# Altium PCB Routing.PCBDOC
Units mm, origin at the board's own origin, x right, y up, seen from the top; angles counter-clockwise.
Board outline 69 x 56 mm, 2 copper layers (Top Layer, Bottom Layer); 41 components, 46 nets, 175 pads, 55 vias.
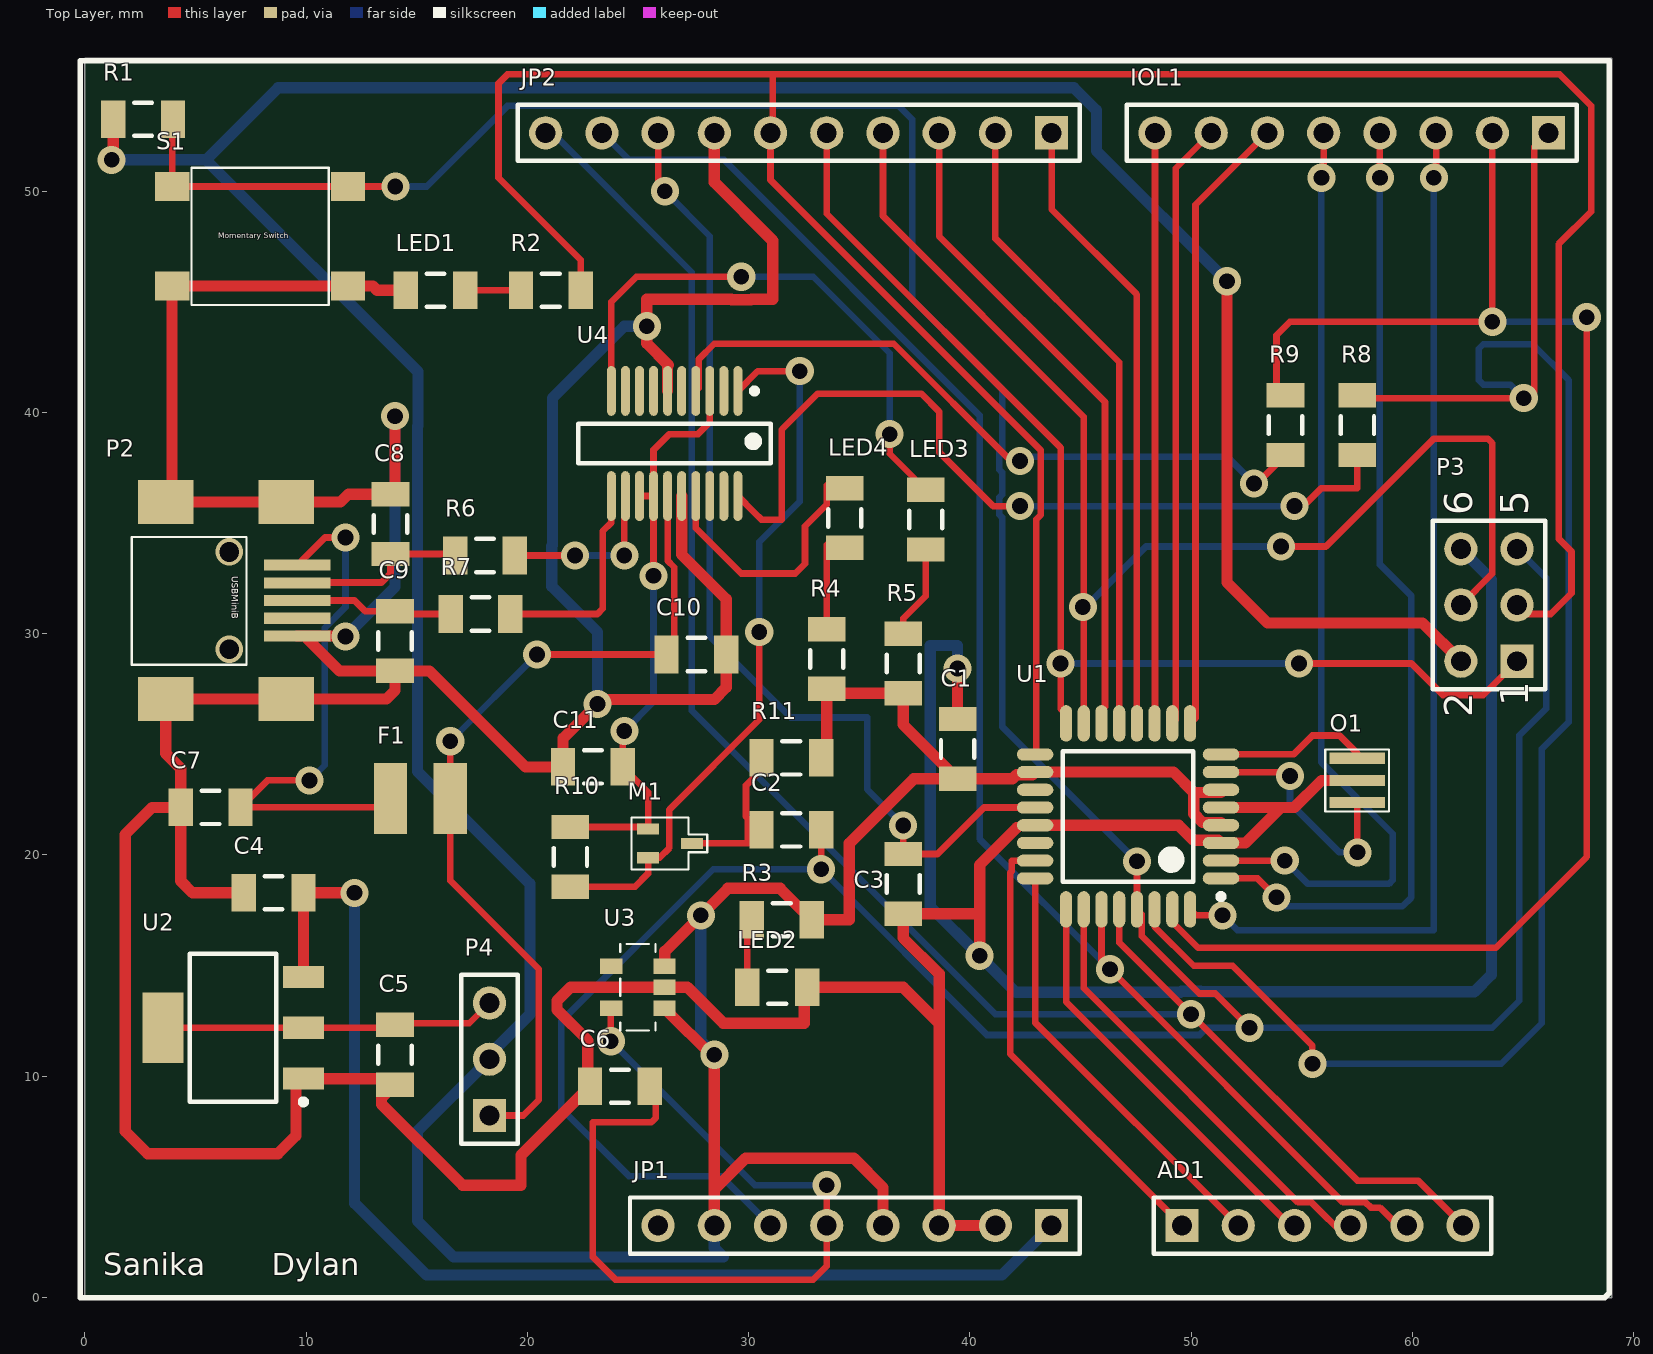
[diagram p0: Top Layer view]
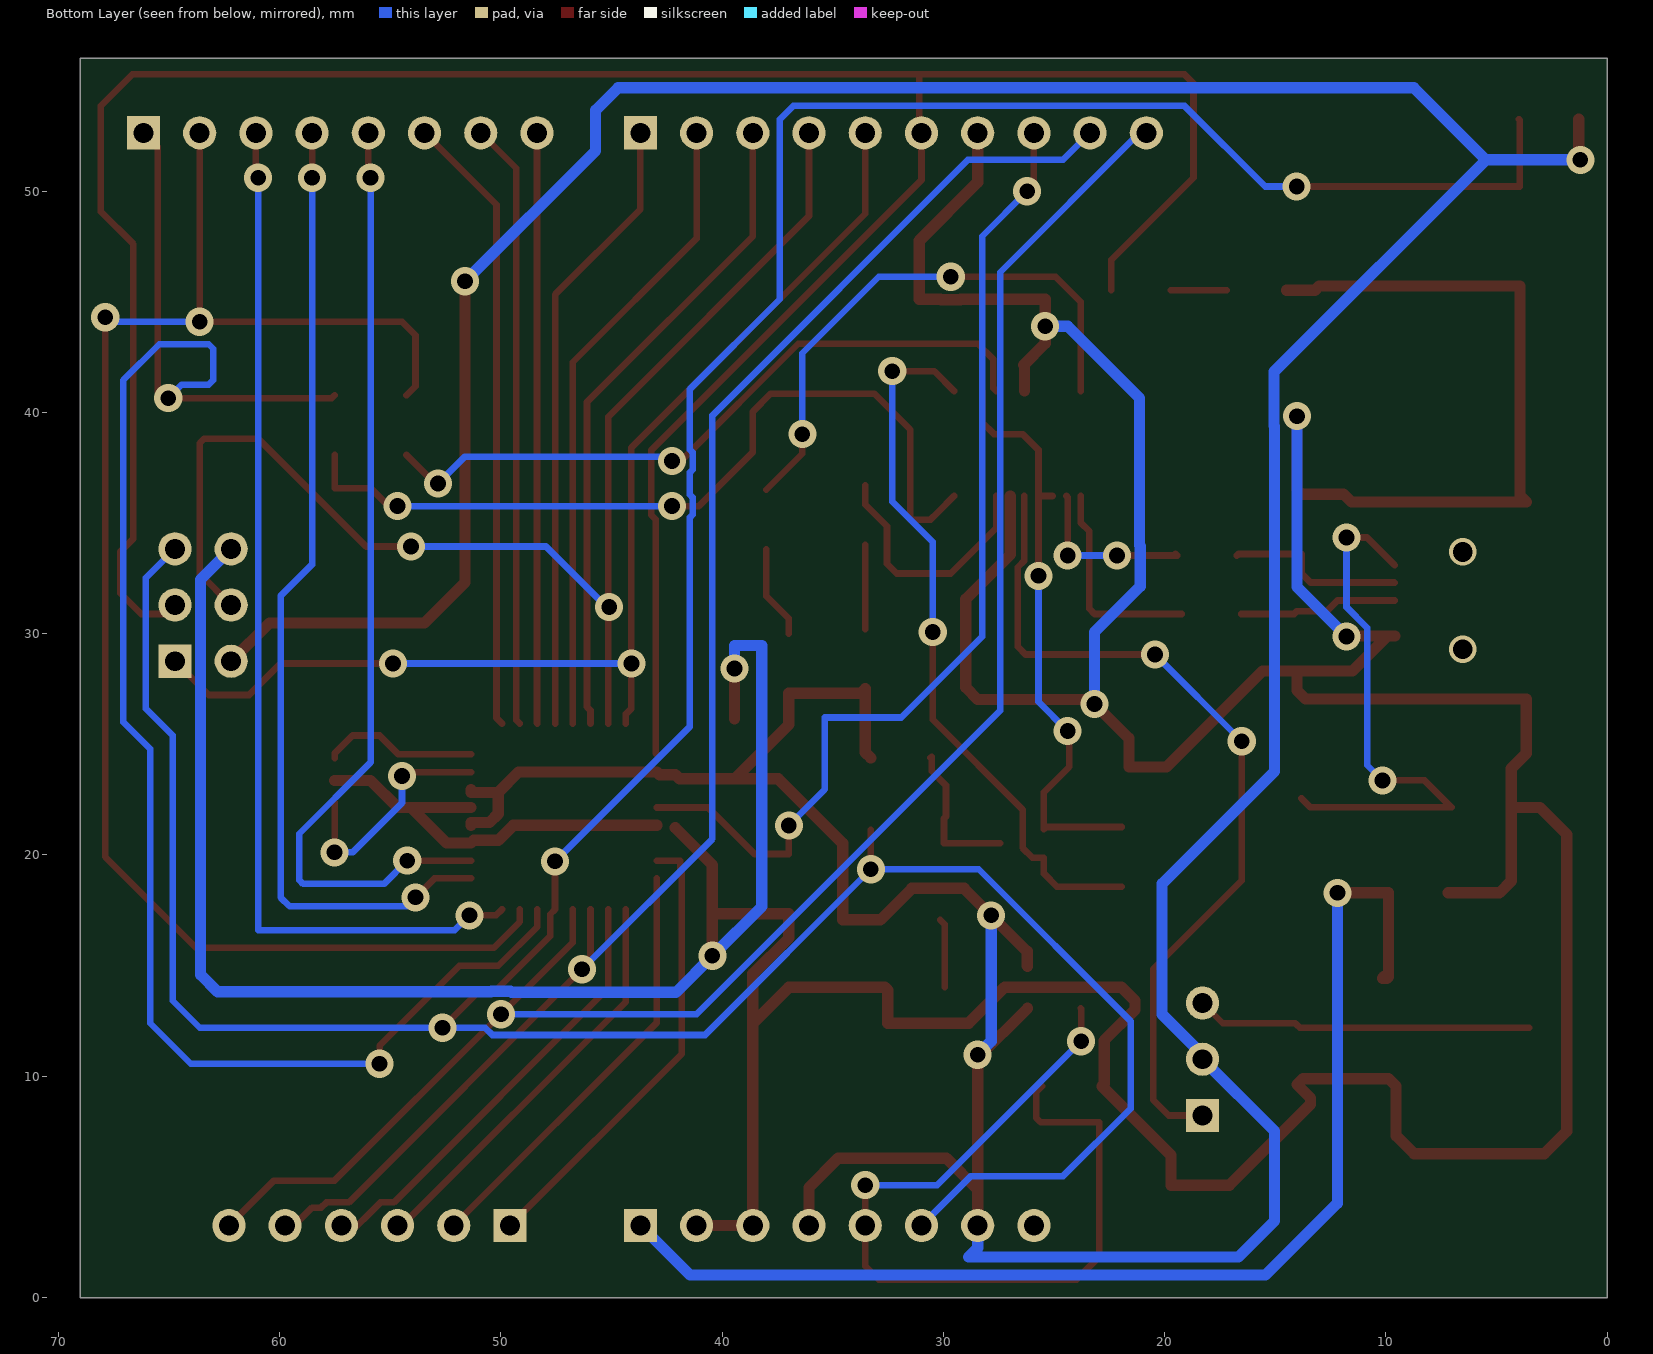
[diagram p1: Bottom Layer view, seen from below]

## Layer stack, top to bottom
Top Solder: solder mask 0.0102, Solder Resist, Dk 3.5
Top Layer: signal copper 0.0356
Dielectric1: dielectric 0.32, FR-4, Dk 4.8
Bottom Layer: signal copper 0.0356
Bottom Solder: solder mask 0.0102, Solder Resist, Dk 3.5

## Board outline
0,0 0,56 69,56 69,0

## Design rules (kind name [scope] priority, off if disabled: settings)
Clearance [All] p1: gap=0.152 ignorepadtopadclearanceinfootprint=FALSE except(0: Arc-Hole Track-Hole SMDPad-Hole THPad-Hole Via-Hole Fill-Hole Poly-Hole Region-Hole Text-Hole; 0.381: Arc-Poly Track-Poly SMDPad-Poly THPad-Poly Via-Poly Fill-Poly Poly-Poly)
FabricationTestPointUsage TestPointUsage [All] p1: valid=0 allowmultiple=FALSE
FabricationTestpoint Testpoint [All] p1: side=3 testpointundercomponent=TRUE minsize=1.016 maxsize=2.54 preferedsize=1.524 minholesize=0 maxholesize=1.016 preferedholesize=0.813 testpointgrid=0.025 allowsidetop=TRUE allowsidebottom=TRUE usegrid=TRUE gridtolerance=0
PolygonConnect [All] p1: connectstyle=Relief reliefconductorwidth=0.254 reliefentries=4 polygonreliefangle="90 Angle" airgapwidth=0.254
RoutingVias [All] p1: holewidth=1.2 width=2.4 viastyle="Through Hole" minholewidth=0.6 minwidth=1.015 maxholewidth=1.2 maxwidth=2.4
SilkToSolderMaskClearance SilkscreenOverComponentPads [IsPad] p1: minsilkscreentomaskgap=0.254 clearancetoexposedcopper=TRUE
SolderMaskExpansion [All] p1: expansion=0.102
Width Width_power [(InNet('5V') OR InNet('VIN') OR InNet('GND'))] p1: maxlimit=0.508 minlimit=0.254 preferedwidth=0.508
Width Width_signal [All] p2: maxlimit=0.305 minlimit=0.203 preferedwidth=0.3 minimp=50.000000 maximp=50.000000 favimp=50.000000
27 further rules are at their usual default settings.

## Components (designator, comment, footprint, x,y, rotation, side; value= is the part's Value field where it differs from the comment)
AD1 "Header 6" HDR1X6 49.581,3.251 r0 top
C1 "Cap Semi" C1206 39.44,24.79 r270 top value=0.1uF
C2 "Cap Semi" C1206 31.927,21.133 r180 top value=0.1uF
C3 "Cap Semi" C1206 36.982,18.694 r90 top value=0.1uF
C4 "Cap Pol3" C1206 8.534,18.288 r180 top value=47uF
C5 "Cap Pol3" C1206 14.021,10.973 r270 top value=10uF
C6 "Cap Pol3" C1206 24.181,9.55 r180 top value=10uF
C7 "Cap Semi" C1206 5.69,22.149 r0 top value=0.1uF
C8 "Cap Semi" C1206 13.818,34.95 r270 top value=47pF
C9 "Cap Semi" C1206 14.021,29.667 r90 top value=47pF
C10 "Cap Pol3" C1206 27.635,29.058 r0 top value=10uF
C11 "Cap Semi" C1206 22.962,23.978 r0 top value=0.1uF
F1 "Component_1" fuse 13.818,22.555 r0 top
IOL1 "Header 8" HDR1X8 66.142,52.629 r180 top
JP1 "Header 8" HDR1X8 43.688,3.251 r180 top
JP2 "Header 10" HDR1X10 43.688,52.629 r180 top
LED1 "LED2" C1206 15.85,45.517 r180 top
LED2 "LED2" C1206 31.293,14.021 r0 top
LED3 "LED2" C1206 37.998,35.154 r90 top
LED4 "LED2" C1206 34.341,35.226 r90 top
M1 "2N7002PW" 2N7002PW-SOT323 25.582,20.523 r180 top
O1 "Resonator" Resonator 57.506,23.368 r90 top
P2 "USBMini-B" USBMiniB 5.08,31.496 r270 top
P3 "Header 3X2" HDR2X3 64.719,28.753 r90 top
P4 "Header 3" HDR1X3 18.288,8.23 r90 top
R1 "Res3" C1206 2.642,53.238 r180 top value=10K
R2 "Res3" C1206 21.06,45.517 r0 top value=1K
R3 "Res3" C1206 31.496,17.069 r0 top value=1K
R4 "Res3" C1206 33.528,28.854 r270 top value=1K
R5 "Res3" C1206 36.982,28.651 r270 top value=1K
R6 "Res3" C1206 18.085,33.528 r180 top value=27
R7 "Res3" C1206 17.882,30.886 r180 top value=27
R8 "Res3" C1206 57.506,39.421 r270 top value=1K
R9 "Res3" C1206 54.254,39.421 r270 top value=1K
R10 "Res3" C1206 21.946,19.914 r90 top value=10K
R11 "Res3" C1206 31.927,24.384 r0 top value=10K
S1 "switch" MomentarySwitch 7.925,47.955 r0 top
U1 "ATmega328-AU" 32A_N 47.142,21.742 r180 top
U2 "REG1117" TI-DCY4_N 6.706,12.192 r180 top
U3 "MIC5205" SOT23-5 24.994,14.021 r90 top
U4 "FTDI" FT231XS 26.655,38.626 r270 top

## Footprints (in the part's own frame and the unit in brackets; to place one, negate y for a bottom-side part, rotate by r counter-clockwise, add the part's x,y. Pads: shape width x height; smd on the part's side, far side on the other; paste and mask are expansions set on the pad)
2N7002PW-SOT323 [mm]
  rect 1x0.5 smd mask+0.1: 1(0.125,-0.65) 2(0.125,0.65) 3(-1.85,0)
  silkscreen extent -2.55,-1.17 0.87,1.17
32A_N [mm] "Thin QFP, 32-Leads, Body 7x7mm, Pitch 0.8mm, IPC Medium Density"
  oval 1.65x0.55 smd: 1(-4.2,2.8) 2(-4.2,2) 3(-4.2,1.2) 4(-4.2,0.4) 5(-4.2,-0.4) 6(-4.2,-1.2) 7(-4.2,-2) 8(-4.2,-2.8) 17(4.2,-2.8) 18(4.2,-2) 19(4.2,-1.2) 20(4.2,-0.4) 21(4.2,0.4) 22(4.2,1.2) 23(4.2,2) 24(4.2,2.8)
  oval 0.55x1.65 smd: 9(-2.8,-4.2) 10(-2,-4.2) 11(-1.2,-4.2) 12(-0.4,-4.2) 13(0.4,-4.2) 14(1.2,-4.2) 15(2,-4.2) 16(2.8,-4.2) 25(2.8,4.2) 26(2,4.2) 27(1.2,4.2) 28(0.4,4.2) 29(-0.4,4.2) 30(-1.2,4.2) 31(-2,4.2) 32(-2.8,4.2)
  silkscreen extent -4.33,-2.95 2.95,3.75, body extent -3.5,-3.5 3.5,3.5, height 1.2
C1206 [mm] "Chip Capacitor, Body 3.2x1.6mm, IPC High Density"
  rect 1.1x1.7 smd: 1(-1.35,0) 2(1.35,0)
  silkscreen extent -0.4,-0.75 0.4,0.75, body extent -1.7,-0.9 1.7,0.9, height 1.3
FT231XS [mm] "FTDI"
  oval 2.25x0.4 smd: 1(-2.34,2.859) 2(-2.34,2.224) 3(-2.34,1.589) 4(-2.34,0.954) 5(-2.34,0.319) 6(-2.34,-0.316) 7(-2.34,-0.951) 8(-2.34,-1.586) 9(-2.34,-2.221) 10(-2.34,-2.856) 11(2.41,-2.856) 12(2.41,-2.221) 13(2.41,-1.586) 14(2.41,-0.951) 15(2.41,-0.316) 16(2.41,0.319) 17(2.41,0.954) 18(2.41,1.589) 19(2.41,2.224) 20(2.41,2.859)
  silkscreen extent -2.46,-4.35 0.94,4.35, body extent -1.96,-4.37 2.03,4.37, height 1.76
fuse [mm]
  rect 1.5x3.2 smd: 1(0,0) 2(2.7,0)
HDR1X3 [mm] "Connector; Header; 3 Position"
  rect 1.5x1.5 hole 0.9: 1(0,0)
  round 1.5 hole 0.9: 2(2.54,0) 3(5.08,0)
  silkscreen extent -1.27,-1.27 6.35,1.27
HDR1X6 [mm] "Connector; Header; 6 Position"
  rect 1.5x1.5 hole 0.9: 1(0,0)
  round 1.5 hole 0.9: 2(2.54,0) 3(5.08,0) 4(7.62,0) 5(10.16,0) 6(12.7,0)
  silkscreen extent -1.27,-1.27 13.97,1.27
HDR1X8 [mm] "Connector; Header; 8 Position"
  rect 1.5x1.5 hole 0.9: 1(0,0)
  round 1.5 hole 0.9: 2(2.54,0) 3(5.08,0) 4(7.62,0) 5(10.16,0) 6(12.7,0) 7(15.24,0) 8(17.78,0)
  silkscreen extent -1.27,-1.27 19.05,1.27
HDR1X10 [mm] "Connector; Header; 10 Position"
  rect 1.5x1.5 hole 0.9: 1(0,0)
  round 1.5 hole 0.9: 2(2.54,0) 3(5.08,0) 4(7.62,0) 5(10.16,0) 6(12.7,0) 7(15.24,0) 8(17.78,0) 9(20.32,0) 10(22.86,0)
  silkscreen extent -1.27,-1.27 24.13,1.27
HDR2X3 [mm] "Connector; Header; 3x2 Position"
  rect 1.5x1.5 hole 0.9: 1(0,0)
  round 1.5 hole 0.9: 2(0,2.54) 3(2.54,0) 4(2.54,2.54) 5(5.08,0) 6(5.08,2.54)
  silkscreen extent -1.27,-1.27 6.35,3.81
MomentarySwitch [mm]
  rect 1.55x1.3 smd mask+0.2: 1(-3.975,2.25) 2(3.975,2.25) 3(-3.975,-2.25) 4(3.975,-2.25)
  silkscreen extent -3.1,-3.1 3.1,3.1
Resonator [mm]
  rect 0.5x2.5 smd mask+0.1: 1(1,0) 2(0,0) 3(-1,0)
  silkscreen extent -1.4,-1.43 1.4,1.45
SOT23-5 [mm]
  rect 0.7x1 smd mask+0.1: 1(-0.95,-1.2) 2(0,-1.2) 3(0.95,-1.2) 4(0.95,1.2) 5(-0.95,1.2)
  silkscreen extent -1.95,-0.8 1.95,0.8
TI-DCY4_N [mm] "SOT223, 4-Leads, Body 6.5x3.5mm, Pitch 2.3mm, IPC Medium Density"
  rect 1.85x1 smd: 1(-3.175,2.3) 2(-3.175,0) 3(-3.175,-2.3)
  rect 1.85x3.2 smd: 4(3.175,0)
  silkscreen extent -3.3,-3.35 1.95,3.47, body extent -1.85,-3.35 1.85,3.35, height 1.8
USBMiniB [mm]
  rect 0.5x3 smd mask+0.2: 1(-1.6,4.53) 2(-0.8,4.53) 3(0,4.53) 4(0.8,4.525) 5(1.6,4.525)
  rect 2x2.5 smd mask+0.3: 5(-4.45,4.03) 5(-4.45,-1.42) 5(4.45,4.03) 5(4.45,-1.42)
  silkscreen extent -2.88,-2.95 2.9,2.22, body extent -3.85,-4.4 3.85,4.8, height 3.9

## Part data
AD1: "Header, 6-Pin", LatestRevisionDate=17-Jul-2002, LatestRevisionNote="Re-released for DXP Platform.", Publisher="Altium Limited"
C1 C2 C3 C7 C8 C9 C11: "Capacitor (Semiconductor SIM Model)", LatestRevisionDate=29-May-2009, LatestRevisionNote="IPC-7351 Footprint Added.", PackageDescription="Chip Capacitor", PackageReference=C1206, Published=8-Jun-2000, Publisher="Altium Limited"
C4 C5 C6 C10: "Polarized Capacitor (Surface Mount)", LatestRevisionDate=29-May-2009, LatestRevisionNote="IPC-7351 Footprint Added.", PackageDescription="Chip Capacitor", PackageReference=C0805, Published=8-Jun-2000, Publisher="Altium Limited"
IOL1 JP1: "Header, 8-Pin", LatestRevisionDate=17-Jul-2002, LatestRevisionNote="Re-released for DXP Platform.", Publisher="Altium Limited"
JP2: "Header, 10-Pin", LatestRevisionDate=17-Jul-2002, LatestRevisionNote="Re-released for DXP Platform.", Publisher="Altium Limited"
LED1 LED2 LED3 LED4: "Typical RED, GREEN, YELLOW, AMBER GaAs LED", LatestRevisionDate=17-Jul-2002, LatestRevisionNote="Re-released for DXP Platform.", PackageDescription="SM LED; 2 Flat Leads", PackageReference=3.2X1.6X1.1, PackageVersion=Feb-2002, Published=8-Jun-2000, Publisher="Altium Limited"
O1: library part Component_1
P3: "Header, 3-Pin, Dual row", LatestRevisionDate=17-Jul-2002, LatestRevisionNote="Re-released for DXP Platform.", Publisher="Altium Limited"
P4: "Header, 3-Pin", LatestRevisionDate=17-Jul-2002, LatestRevisionNote="Re-released for DXP Platform.", Publisher="Altium Limited"
R1 R2 R3 R4 R5 R6 R7 R8 R9 R10 R11: "Resistor", LatestRevisionDate=29-May-2009, LatestRevisionNote="IPC-7351 Footprint Added.", PackageDescription="Chip Resistor", PackageReference=J1-0603, Published=8-Jun-2000, Publisher="Altium Limited"
U1: "8-bit AVR Microcontroller, 32KB Flash, 1KB EEPROM, 2KB SRAM, 32-pin TQFP, Industrial Grade (-40°C to 85°C)", Supplier Part Number 1=ATMEGA328-AU-ND, Code_JEDEC=MS-026-ABA, ComponentLink1Description="Manufacturer Link", ComponentLink1URL=http://www.atmel.com/products/avr/default.asp?, ComponentLink2Description="ATmega48A/48PA/88A/88PA/168A/168PA/328/328P Datasheet", ComponentLink2URL=http://www.atmel.com/dyn/resources/prod_documents/8271.pdf, ComponentLink3Description="ATmega48A/48PA/88A/88PA/168A/168PA/328/328P Summary", ComponentLink3URL=http://www.atmel.com/dyn/resources/prod_documents/8271S.pdf, ComponentLink4Description="Atmel.com Home", ComponentLink4URL=http://www.atmel.com, DatasheetVersion="revA, Jan-2010", PackageDescription="32-Lead, 7x7x1.0 mm Body, 0.8mm Lead Pitch, Thin Profile Plastic Quad Flat Package (TQFP)", PackageReference=32A, PackageVersion="revB, Oct-2001", Published=1-Apr-2010, Publisher="Altium Limited", Supplier 1=Digi-Key, Supplier 2=Mouser, Supplier Part Number 2=556-ATMEGA328-AU
U4: library part FT231XS

## Via types
v1: diameter 1.27, hole 0.711, Top Layer to Bottom Layer, 53 vias
v2: diameter 1.256, hole 0.9, Top Layer to Bottom Layer, 2 vias

## Nets (pads, with @x,y where several pads share a name; then routed paths per layer and width w, separated by ;. In a path a pad name is that pad's centre, name@x,y a point inside that pad or via, vN(x,y) a via of type N, cw(c..) or ccw(c..) an arc to the next point about the centre after c; other vN are vias at no path point)
3.3V: C6.1 JP1.5 U3.5 | length 39.4
  Top Layer w0.3: v1(23.774,11.582) 23.774,13.052 U3.5 ; C6.1 25.806,9.275 25.806,8.128 25.603,7.925 22.962,7.925 22.962,1.829 23.978,0.813 32.918,0.813 33.528,1.422 JP1.5 v1(33.528,5.08)
  Bottom Layer w0.3: v1(23.774,11.582) 30.277,5.08 v1(33.528,5.08)
3.3vFTDI: C11.2 M1.1 R10.2 U4.3 U4.13 U4.14 | length 26.7
  Top Layer w0.3: R10.2 25.367,21.264 M1.1 25.457,22.832 C11.2 v1@24.312,25.531 ; U4.13 U4.14 ; v1(25.703,32.612) U4.14 ; U4.3 28.243,39.546 27.711,39.014 26.416,39.014 25.703,38.302 U4.14
  Bottom Layer w0.3: v1(24.384,25.603) 25.703,26.922 v1(25.703,32.612)
5JUMP: C5.1 P4.3 U2.2 U2.4 | length 15.2
  Top Layer w0.3: U2.4 U2.2 13.89,12.192 C5.1 14.093,12.395 17.374,12.395 P4.3
5V: C1.2 JP1.4 JP1.7 P3.2 P4.2 R1.2 R3.2 R4.2 R5.2 R11.2 U1.4 U1.6 U1.18 U3.1 U3.3 | length 230.9
  Top Layer w0.508: v1@1.292,51.685 R1.2 ; U3.1 28.448,10.816 28.448,4.877 ; U3.3 26.213,14.99 26.213,15.646 v1(27.838,17.272) 29.058,18.491 31.424,18.491 R3.2 34.544,17.069 34.544,20.523 37.461,23.44 C1.2 ; JP1.7@28.245,3.048 JP1.7 28.448,4.877 ; R11.2 33.528,24.635 R4.2 33.731,27.301 R5.2 36.982,25.898 C1.2 ; JP1.4 36.068,4.978 34.747,6.299 29.87,6.299 28.448,4.877 ; U1.4 51.342,21.461 50.51,21.461 50.111,21.86 50.111,22.824 ; U1.6 51.342,22.824 50.111,22.824 ; v1(51.613,45.923) 51.613,32.309 53.442,30.48 60.452,30.48 P3.2 ; C1.2 41.927,23.44 42.11,23.624 42.824,23.624 U1.18 49.192,23.742 50.111,22.824
  Bottom Layer w0.508: v1(1.219,51.41) 5.486,51.41 ; v1(27.838,17.272) 27.838,11.582 v1(28.448,10.973) ; JP1.7 28.448,2.235 28.854,1.829 16.662,1.829 15.037,3.454 15.037,7.518 P4.2 18.288,10.973 20.117,12.802 20.117,18.694 15.037,23.774 15.037,39.37 15.062,39.396 15.062,41.834 5.486,51.41 ; v1(51.613,45.923) 45.72,51.816 45.72,53.645 44.704,54.661 8.738,54.661 5.486,51.41
A0: AD1.1 U1.23 | length 20.8
  Top Layer w0.3: U1.23 41.891,19.742 41.891,19.258 41.815,19.182 41.815,11.017 AD1.1
A1: AD1.2 U1.24 | length 19.5
  Top Layer w0.3: U1.24 42.942,12.43 AD1.2
A2: AD1.3 U1.25 | length 18.7
  Top Layer w0.3: U1.25 44.342,13.366 54.458,3.251 AD1.3
A3: AD1.4 U1.26 | length 21.1
  Top Layer w0.3: U1.26 45.142,13.989 54.828,4.304 55.437,4.304 57.034,2.707 57.034,3.418 AD1.4
AD4/SDA: AD1.5 JP2.9 U1.27 | length 71.4
  Top Layer w0.3: U1.27 45.942,15.221 v1(46.33,14.834) 56.86,4.304 57.876,4.304 58.115,4.064 58.522,4.064 59.334,3.251 AD1.5
  Bottom Layer w0.3: JP2.9 24.587,51.41 28.89,51.41 40.437,39.863 40.437,20.726 v1(46.33,14.834) ; AD1.5@59.538,3.658 59.538,3.454 AD1.5
AD5/SCL: AD1.6 JP2.10 U1.28 | length 79.6
  Top Layer w0.3: U1.28 46.742,16.046 v1(49.987,12.802) 57.506,5.283 60.249,5.283 AD1.6
  Bottom Layer w0.3: JP2.10 21.133,52.629 27.432,46.33 27.432,26.522 41.153,12.802 v1(49.987,12.802)
AREF: C3.2 JP2.8 U1.20 | length 45.1
  Top Layer w0.3: JP2.8 25.908,50.495 v1@26.01,50.394 ; v1@36.982,20.93 C3.2 38.536,20.044 40.634,22.142 U1.20
  Bottom Layer w0.3: v1(26.213,49.987) 28.245,47.955 28.245,40.843 28.245,29.87 31.902,26.213 35.357,26.213 35.357,22.962 v1(36.982,21.336)
D+: C9.2 P2.3 R7.2 | length 7.2
  Top Layer w0.3: P2.3 12.192,31.496 12.671,31.017 C9.2 14.152,30.886 R7.2
D-: C8.2 P2.2 R6.2 | length 8.2
  Top Layer w0.3: P2.2 9.623,32.309 13.411,32.309 13.818,32.715 C8.2 16.662,33.6 R6.2
DTR: C2.2 M1.3 R11.1 | length 6.8
  Top Layer w0.3: M1.3 29.968,20.523 29.968,21.645 29.877,21.736 29.877,23.141 30.526,23.79 30.526,24.435 R11.1
DTR_FTDI: M1.2 R10.1 U4.1 | length 32.6
  Top Layer w0.3: R10.1 24.863,18.564 25.457,19.158 M1.2 25.969,19.873 26.416,20.32 26.416,22.05 30.48,26.114 v1(30.48,30.074) ; U4.1 30.406,41.859 v1@32.106,41.859
  Bottom Layer w0.3: v1(30.48,30.074) 30.48,34.138 32.309,35.966 v1(32.309,41.859)
GND: C1.1 C3.1 C4.2 C5.2 C6.2 C7.1 C8.1 C9.1 C10.2 C11.1 JP1.2 JP1.3 JP2.7 LED1.2 LED2.2 O1.2 P2.5 P3.6 S1.3 S1.4 U1.3 U1.5 U1.21 U2.1 U3.2 U4.6 U4.16 | length 323.7
  Top Layer w0.508: C4.2 4.877,18.288 4.34,18.825 C7.1 ; P2.5@9.605,29.896 P2.5@9.931,29.896 ; v1(11.786,29.87) 11.76,29.896 P2.5@9.931,29.896 ; v1(14.021,39.827) 14.021,36.504 C8.1 11.916,36.3 11.562,35.946 9.11,35.946 3.66,35.946 3.95,36.236 S1.3 S1.4 13.02,45.705 13.208,45.517 LED1.2 ; U4.6 26.338,42.114 26.367,42.142 25.4,43.109 v1(25.4,43.891) 25.4,45.11 29.21,45.11 29.236,45.085 30.099,45.085 30.124,45.11 31.09,45.11 31.09,47.752 28.448,50.394 JP2.7 ; U4.16 26.973,33.58 28.985,31.568 C10.2 28.985,27.563 28.448,27.026 23.368,27.026 v1(23.165,26.822) 21.612,25.269 C11.1 19.914,23.978 15.574,28.317 C9.1 ; C1.1 v1(39.44,28.429) ; v1@40.437,15.646 40.437,17.272 ; JP1.2 JP1.3 38.608,12.395 ; 42.11,21.224 40.437,19.55 40.437,17.272 ; U1.21 49.43,21.342 50.111,20.661 51.224,20.661 U1.3 52.451,20.542 54.051,22.142 ; U1.5 54.051,22.142 ; O1.2 55.88,23.368 54.654,22.142 54.051,22.142 ; C7.1 4.34,23.905 3.66,24.585 3.66,27.046 9.11,27.046 13.635,27.046 14.021,27.432 C9.1 ; C7.1 3.048,22.149 1.829,20.93 1.829,7.518 2.845,6.502 8.738,6.502 9.55,7.315 9.55,9.562 U2.1 13.752,9.892 C5.2 13.411,9.013 13.411,8.738 17.069,5.08 19.71,5.08 19.71,6.43 C6.2 22.733,9.648 22.733,11.608 21.336,13.005 21.336,13.411 21.946,14.021 U3.2 27.229,14.021 28.854,12.395 32.512,12.395 32.512,13.89 LED2.2 36.982,14.021 38.608,12.395 ; P2.5@9.931,29.896 11.51,28.317 C9.1 ; 38.608,12.395 38.608,14.63 36.982,16.256 C3.1 40.364,17.344 40.437,17.272
  Bottom Layer w0.508: v1(11.786,29.87) 14.021,32.106 v1(14.021,39.827) ; v1(23.165,26.822) 23.165,30.074 21.107,32.131 21.107,33.959 21.133,33.985 21.133,40.64 24.384,43.891 v1(25.4,43.891) ; v1(39.44,28.429) 39.44,29.445 39.421,29.464 38.202,29.464 38.202,17.678 v1(40.437,15.443) 42.088,13.792 49.505,13.792 49.556,13.843 50.419,13.843 50.444,13.818 62.789,13.818 63.563,14.592 63.563,32.449 P3.6
IO2: IOL1.3 U1.32 | length 47.6
  Top Layer w0.3: U1.32 50.213,17.272 v1(51.41,17.272) ; v1@61.062,50.698 IOL1.3
  Bottom Layer w0.3: v1@51.206,17.475 v1(51.41,17.272) 52.082,16.6 60.96,16.6 v1(60.96,50.597)
IO3: IOL1.4 U1.1 | length 44.6
  Top Layer w0.3: U1.1 52.99,18.942 v1(53.848,18.085) ; v1@58.522,50.394 v1(58.522,50.597) IOL1.4
  Bottom Layer w0.3: v1(53.848,18.085) 54.254,17.678 59.538,17.678 59.944,18.085 59.944,31.699 58.522,33.122 v1(58.522,50.597)
IO4: IOL1.5 U1.2 | length 43.5
  Top Layer w0.3: U1.2 v1(54.222,19.742) ; v1@55.982,50.495 IOL1.5
  Bottom Layer w0.3: v1(54.222,19.742) 55.27,18.694 58.928,18.694 59.1,18.866 59.1,20.961 55.88,24.181 v1(55.88,50.597)
IO5: IOL1.6 U1.9 | length 28.1
  Top Layer w0.3: U1.9 50.19,26.19 50.19,49.378 IOL1.6
IO6: IOL1.7 U1.10 | length 27.4
  Top Layer w0.3: U1.10 49.3,26.1 49.3,51.027 IOL1.7
IO7: IOL1.8 U1.11 | length 26.7
  Top Layer w0.3: U1.11 48.362,25.962 IOL1.8
IO8: JP2.1 U1.12 | length 28.3
  Top Layer w0.3: JP2.1 43.688,49.174 47.542,45.32 U1.12
IO9: JP2.2 U1.13 | length 29
  Top Layer w0.3: JP2.2 41.148,47.854 46.742,42.259 U1.13
MISO: JP2.5 P3.1 U1.16 | length 53
  Top Layer w0.3: JP2.5 33.528,48.971 44.094,38.405 v1(44.094,28.651) 44.094,26.619 44.342,26.371 U1.16 ; v1(54.864,28.651) 59.944,28.651 61.366,27.229 63.195,27.229 P3.1
  Bottom Layer w0.3: v1(44.094,28.651) v1(54.864,28.651)
MOSI: JP2.4 P3.4 U1.15 | length 60.2
  Top Layer w0.3: JP2.4 36.068,48.87 45.142,39.795 U1.15 ; v1(54.051,33.934) 56.083,33.934 60.96,38.811 63.398,38.811 63.602,38.608 63.602,32.715 P3.4
  Bottom Layer w0.3: v1(45.1,31.2) 45.1,31.1 45.11,31.09 47.955,33.934 v1(54.051,33.934)
NetLED1_1: LED1.1 R2.1 | length 2.5
  Top Layer w0.3: LED1.1 R2.1
NetLED2_1: LED2.1 R3.1 | length 3.1
  Top Layer w0.3: LED2.1 29.943,16.866 R3.1
NetLED3_1: LED3.1 R5.1 | length 4.2
  Top Layer w0.3: R5.1 36.982,30.683 37.998,31.699 LED3.1
NetLED4_1: LED4.1 R4.1 | length 3.8
  Top Layer w0.3: R4.1 LED4.1@33.528,34.007
NetO1_2: O1.1 U1.8 | length 7.1
  Top Layer w0.3: U1.8 54.616,24.542 55.474,25.4 56.693,25.4 57.506,24.587 O1.1
NetO1_3: O1.3 U1.7 | length 10.4
  Top Layer w0.3: U1.7 54.286,23.742 v1(54.458,23.571) ; v1@57.506,20.523 O1.3
  Bottom Layer w0.3: v1(54.458,23.571) 54.458,22.352 56.693,20.117 v1(57.506,20.117) v1@57.607,20.015
NetR6_1: R6.1 U4.12 | length 8.4
  Top Layer w0.3: R6.1@19.507,33.6 R6.1 v1(22.149,33.528) ; v1(24.384,33.528) 24.384,36.167 U4.12
  Bottom Layer w0.3: v1(22.149,33.528) 22.149,33.974 22.158,33.984 22.614,33.528 v1(24.384,33.528)
NetR7_1: R7.1 U4.11 | length 9.5
  Top Layer w0.3: R7.1 23.165,30.886 23.401,31.122 23.401,34.623 23.798,35.021 U4.11
RESET: C2.1 JP1.6 P3.5 R1.1 S1.1 S1.2 U1.29 | length 175
  Top Layer w0.3: R1.1 3.95,53.197 S1.1 S1.2 v1(14.036,50.205) ; v1(33.277,19.352) C2.1 ; v1(47.549,19.71) 47.549,17.549 U1.29 47.765,17.32 47.765,16.335 50.361,13.739 51.082,13.739 v1(52.629,12.192)
  Bottom Layer w0.3: v1(14.036,50.205) 15.458,50.205 19.101,53.848 36.779,53.848 37.389,53.238 37.389,45.11 41.453,41.046 41.453,38.308 41.328,38.183 41.328,37.407 41.453,37.282 41.453,36.276 41.328,36.151 41.328,35.375 41.453,35.25 41.453,25.806 v1(47.549,19.71) ; JP1.6 28.753,5.486 24.587,5.486 21.539,8.534 21.539,12.49 28.4,19.352 v1(33.277,19.352) 40.765,11.864 50.375,11.864 50.703,12.192 v1(52.629,12.192) 63.602,12.192 64.821,13.411 64.821,25.4 66.04,26.619 66.04,32.512 P3.5
RX-I: IOL1.1 R8.1 U1.30 | length 80.4
  Top Layer w0.3: U1.30 48.342,16.758 50.109,14.991 51.862,14.991 55.474,11.379 v1(55.474,10.566) ; R8.1 57.636,40.64 v1(65.024,40.64) 65.227,40.64 65.5,40.913 65.5,51.987 IOL1.1
  Bottom Layer w0.3: v1(55.474,10.566) 64.008,10.566 65.837,12.395 65.837,24.79 67.056,26.01 67.056,41.453 65.43,43.078 63.195,43.078 62.992,42.875 62.992,41.453 63.195,41.25 64.414,41.25 v1(65.024,40.64)
RXD: R9.2 U4.4 | length 31.6
  Top Layer w0.3: U4.4 27.741,41.099 27.741,42.394 28.448,43.101 36.554,43.101 41.859,37.795 v1(42.266,37.795) ; v1(52.832,36.779) 52.963,36.779 R9.2
  Bottom Layer w0.3: v1(42.266,37.795) 42.469,37.998 51.613,37.998 v1(52.832,36.779)
RXLED: LED4.2 U4.17 | length 11.4
  Top Layer w0.3: U4.17 27.608,34.774 29.667,32.715 32.106,32.715 32.549,33.158 32.549,34.855 33.528,35.834 LED4.2@33.528,36.707
SCK: JP2.6 P3.3 R2.2 U1.17 | length 122.9
  Top Layer w0.3: R2.2 22.41,46.881 18.694,50.597 18.694,54.864 19.101,55.27 31.09,55.27 ; U1.17 43,24.6 43,35.172 43.203,35.375 43.203,38.28 30.988,50.495 JP2.6 31.09,52.73 31.09,55.27 ; P3.3 65.126,30.886 66.243,30.886 67.181,31.824 67.181,33.713 66.6,34.294 66.6,47.6 68.072,49.072 68.072,53.848 66.65,55.27 31.09,55.27
SS: JP2.3 U1.14 | length 29.9
  Top Layer w0.3: JP2.3 38.608,47.955 46.1,40.463 46.1,26.69 45.942,26.532 U1.14
TX-O: IOL1.2 R9.1 U1.31 | length 71.4
  Top Layer w0.3: U1.31 49.142,16.976 50.318,15.8 63.755,15.8 67.869,19.914 v1@67.869,44.094 ; R9.1 53.848,41.177 53.848,43.485 54.458,44.094 v1(63.602,44.094) IOL1.2
  Bottom Layer w0.3: v1(63.602,44.094) 67.666,44.094 v1(67.869,44.298)
TXD: R8.2 U4.20 | length 37.8
  Top Layer w0.3: U4.20 30.277,35.453 30.576,35.154 31.496,35.154 31.496,39.218 33.122,40.843 37.795,40.843 38.608,40.03 38.608,38.202 41.046,35.763 v1(42.266,35.763) ; v1@55.067,35.763 55.88,36.576 57.506,36.576 R8.2
  Bottom Layer w0.3: v1(42.266,35.763) v1(54.661,35.763)
TXLED: LED3.2 U4.10 | length 25.1
  Top Layer w0.3: U4.10 23.798,44.998 24.926,46.126 v1@29.464,46.126 ; v1(36.373,39.014) 36.373,38.129 LED3.2
  Bottom Layer w0.3: v1(29.667,46.126) 32.918,46.126 36.373,42.672 v1(36.373,39.014)
USBVCC: C10.1 F1.2 P4.1 U4.15 | length 39.2
  Top Layer w0.3: v1(16.518,25.138) F1.2 16.518,18.839 20.523,14.834 20.523,8.941 19.812,8.23 P4.1 ; v1(20.437,29.058) C10.1 26.641,29.413 26.641,33 26.338,33.303 U4.15
  Bottom Layer w0.3: v1(16.518,25.138) v1(20.437,29.058)
VBUS: C7.2 F1.1 P2.1 | length 24.9
  Top Layer w0.3: P2.1 10.855,34.341 v1(11.786,34.341) ; v1(10.16,23.368) 8.259,23.368 C7.2 13.411,22.149 F1.1
  Bottom Layer w0.3: v1(10.16,23.368) 10.848,24.056 10.848,30.259 11.786,31.196 v1(11.786,34.341)
VIN: C4.1 JP1.1 U2.3 | length 54.5
  Top Layer w0.508: U2.3 U2.3@9.888,14.492 ; v1(12.192,18.288) C4.1 9.884,14.496 U2.3@9.888,14.492 ; U2.3@9.888,14.492 10.095,14.492 10.16,14.427 9.953,14.427 U2.3@9.888,14.492
  Bottom Layer w0.508: v1(12.192,18.288) 12.192,4.267 15.443,1.016 41.453,1.016 JP1.1
pads on no net: JP1.8 P2.4 U1.19 U1.22 U3.4 U4.2 U4.5 U4.7 U4.8 U4.9 U4.18 U4.19
copper on no net:
  other v2: 6.53,29.296 6.53,33.696

## Silkscreen, mask and mechanical layers (free items; w line width, h text height)
Top Overlay:
  lines w0.254: -0.203,0 -0.203,55.88 68.885,55.88 68.885,0.203 68.682,0 -0.203,0
  text "Sanika       Dylan" at 0.846,1 h1
Mechanical 16:
  drawing of 1873 lines, arcs and shapes, not listed
  text "1" at -29.286,135.509 h1.78
  text "2" at 43.358,135.509 h1.78
  text "3" at 116.51,135.509 h1.78
  text "4" at 189.408,135.509 h1.78
  text "A" at -63.627,112.497 h1.78
  text "A" at 223.393,112.497 h1.78
  text "B" at -63.627,64.44 h1.78
  text "B" at 223.393,64.44 h1.78
  text "C" at -63.627,15.926 h1.78
  text "ENGINEER:" at 108.458,-21.082 h1.14
  text "TITLE:" at 146.558,-21.082 h1.14
  text "PCB DESIGNER:" at 108.458,-28.575 h1.14
  text "D" at -63.627,-32.08 h1.78
  text "D" at 223.393,-32.08 h1.78
  text "DATE:" at 108.458,-36.322 h1.14
  text "PART NO.:" at 146.558,-36.322 h1.14
  text "REV:" at 199.898,-36.322 h1.14
  text "Altium Limited" at 75.438,-38.862 h1.78
  text ".PRINT_DATE" at 109.728,-39.37 h1.78
  text "12a Rodborough Rd" at 75.438,-41.402 h1.78
  text "Frenchs Forest" at 75.438,-43.942 h1.78
  text "FILE NAME:" at 108.458,-43.942 h1.14
  text "DWG NO:" at 146.558,-43.942 h1.14
  text "SCALE:" at 199.898,-43.942 h1.14
  text "NSW 2086" at 75.438,-46.482 h1.78
  text ".PCB_FILE_NAME_NO_PATH" at 109.728,-46.99 h1.78
  text "1" at -29.286,-52.451 h1.78
  text "2" at 43.358,-52.451 h1.78
  text "3" at 116.51,-52.451 h1.78
  text "4" at 189.408,-52.451 h1.78

## Text inside footprints (layer, text, board x,y; h text height)
P2: Top Overlay "USBMiniB" at 6.655,32.596 h0.3 r270
P3: Top Overlay "1" at 65.227,26.721 h1.27 r90; Top Overlay "2" at 62.687,26.213 h1.27 r90; Top Overlay "5" at 65.227,35.357 h1.27 r90; Top Overlay "6" at 62.687,35.357 h1.27 r90
S1: Top Overlay "Momentary Switch" at 6.025,47.855 h0.25